# Altium PCB Control_PS_PCB.PcbDoc
Units mm, origin at the board's own origin, x right, y up, seen from the top; angles counter-clockwise.
Board outline 150 x 60 mm, 2 copper layers (Top Layer, Bottom Layer); 69 components, 46 nets, 167 pads, 5 vias.
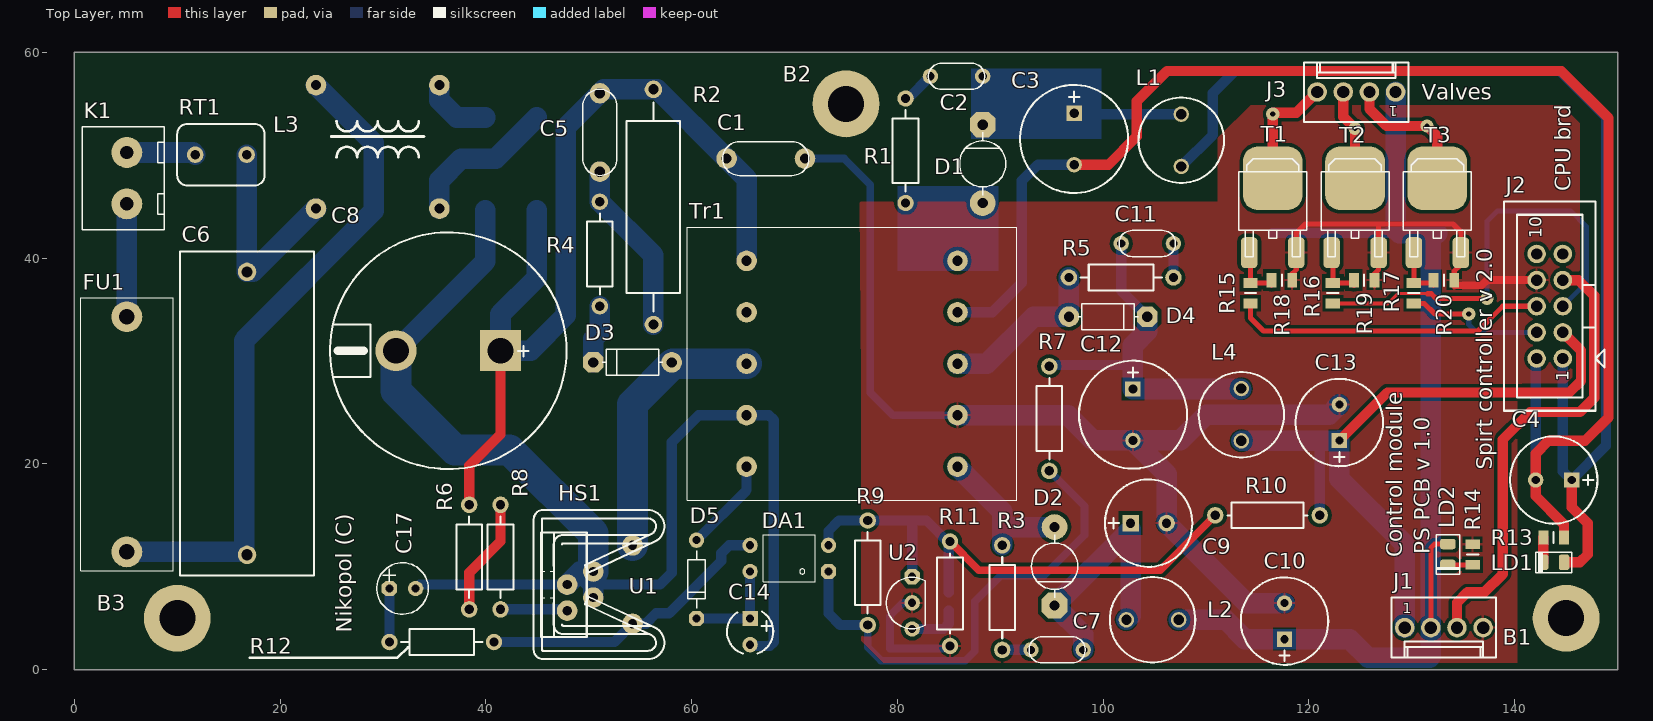
[diagram p0: Top Layer view]
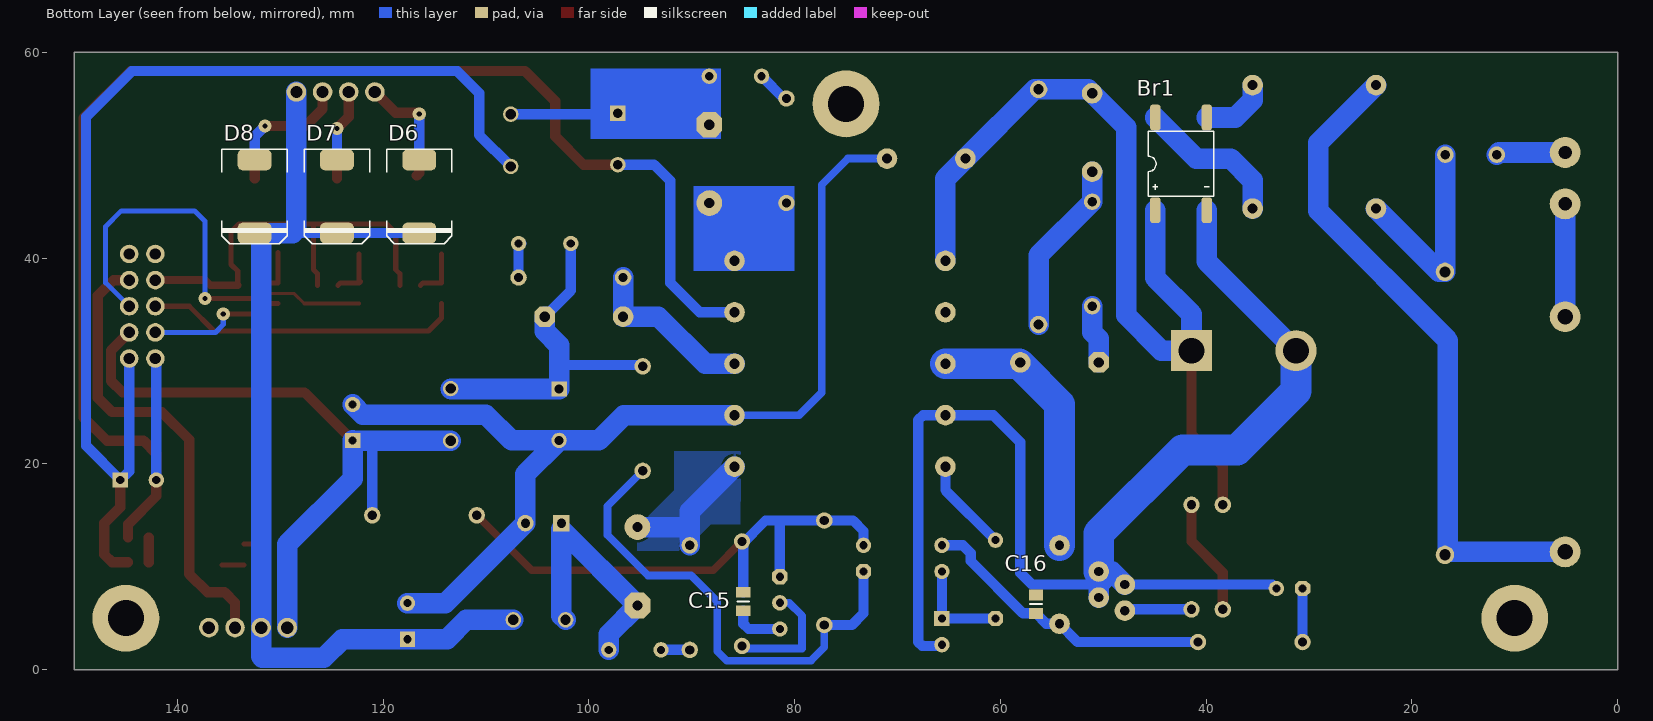
[diagram p1: Bottom Layer view, seen from below]
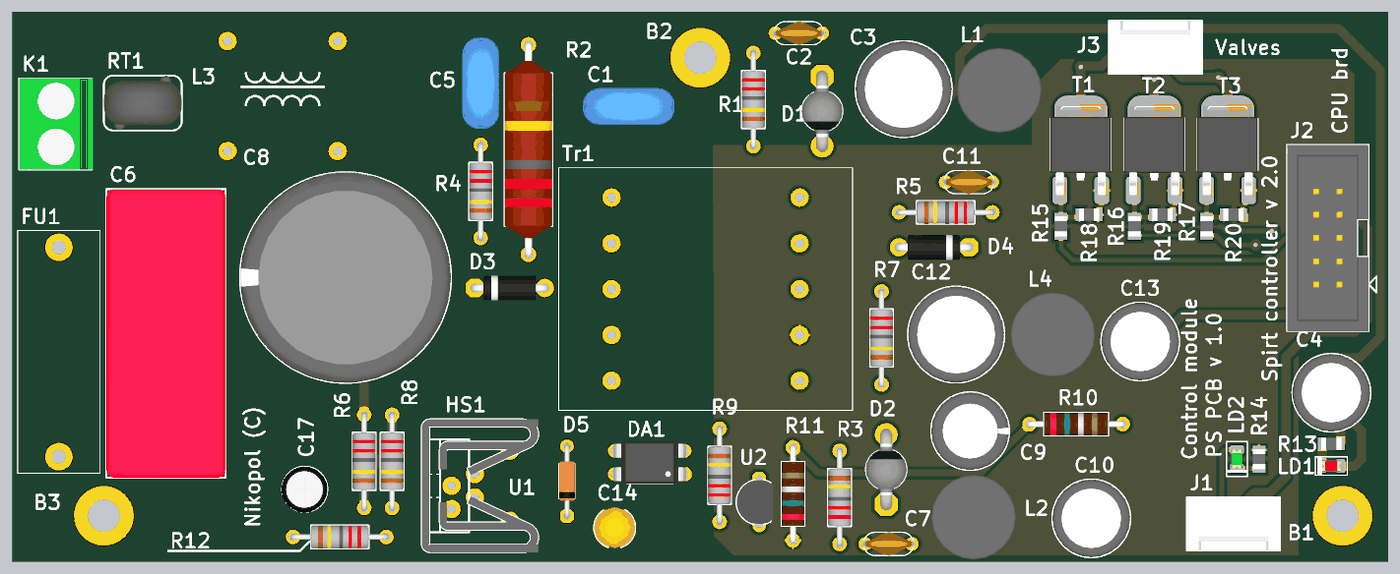
[diagram p2: 3D render of the assembled board from above, using the file's embedded part models]
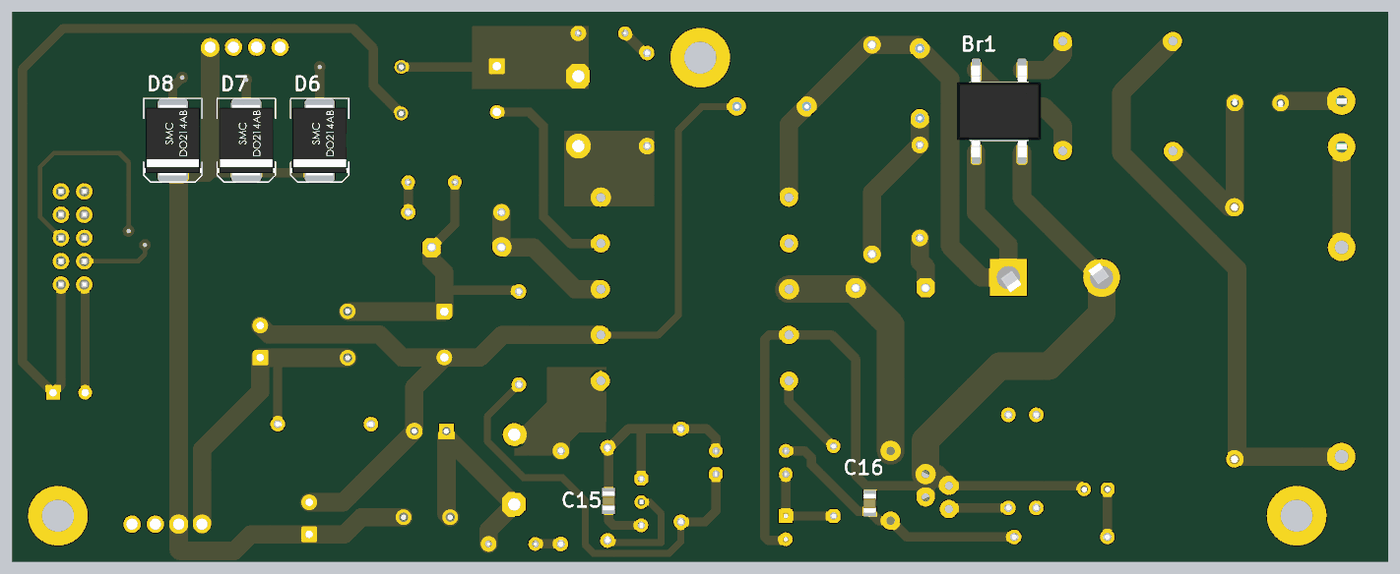
[diagram p3: 3D render of the assembled board from below, using the file's embedded part models]

## Layer stack, top to bottom
Top Solder: solder mask 0.0102, Solder Resist, Dk 3.5
Top Layer: signal copper 0.0356
Dielectric 1: dielectric 0.32, FR-4, Dk 4.8
Bottom Layer: signal copper 0.0356
Bottom Solder: solder mask 0.0102, Solder Resist, Dk 3.5

## Board outline
0,0 150,0 150,60 0,60

## Design rules (kind name [scope] priority, off if disabled: settings)
Clearance Clearance_1 [InNamedPolygon('Bottom Layer- GND')] p1: gap=0.35
Clearance [All] p2: gap=0.254
Height [All] p1: minheight=0 maxheight=50 prefheight=12.7
HoleSize [All] p1: absolutevalues=TRUE maxlimit=10 minlimit=0.025 maxpercent=80.000 minpercent=20.000
PolygonConnect [All] p1: connectstyle=Relief reliefconductorwidth=0.254 reliefentries=4 polygonreliefangle="90 Angle" airgapwidth=0.254
RoutingVias [All] p1: holewidth=0.711 width=1.27 viastyle="Through Hole" minholewidth=0.711 minwidth=1.27 maxholewidth=0.711 maxwidth=1.27
SilkToSilkClearance [All] p1: silktosilkclearance=0
SilkToSolderMaskClearance [IsPad] p1: minsilkscreentomaskgap=0 clearancetoexposedcopper=TRUE
SolderMaskExpansion [All] p1: expansion=0.102
UnpouredPolygon [All] p1: allowunpoured=FALSE
Width [All] p1: maxlimit=5 minlimit=0.254 preferedwidth=0.5
25 further rules are at their usual default settings.

## Components (designator, comment, footprint, x,y, rotation, side; value= is the part's Value field where it differs from the comment)
B1 "Plated Hole" MTG350_650 145,5 r0 top
B2 "Plated Hole" MTG350_650 75,55 r0 top
B3 "Plated Hole" MTG350_650 10,5 r0 top
Br1 "DB104-S" DB-S 42.437,49.168 r180 bottom
C1 "2.2n" "C Y2 7.5b" 67.202,49.676 r0 top
C2 "22p" Cap-Disk-D5.5-R5.08 85.744,57.677 r0 top
C3 "56uF" CAPPR500-1050X1150 97.174,51.581 r270 top
C4 "100uF" CAPPR350-850X800 143.783,18.434 r180 top
C5 "2.7n" "C Y2 7.5b" 51.073,52.216 r90 top
C6 "1uF" CAPR2750-1300X3150X2400 16.783,24.911 r270 top
C7 "22p" Cap-Disk-D5.5-R5.08 95.523,1.924 r0 top
C8 "150uF" CAPPR1000-2300X4200 36.341,31.007 r180 top
C9 "220uF" CAPPR350-850X1300 104.413,14.243 r0 top
C10 "100uF" CAPPR350-850X800 117.621,4.718 r90 top
C11 "470p" Cap-Disk-D5.5-R5.08 104.286,41.421 r180 top
C12 "470uF" CAPPR500-1050X2200 102.889,24.784 r270 top
C13 "100uF" CAPPR350-850X800 122.955,24.022 r90 top
C14 "1uF" CAPPRB254-450X710 65.678,3.702 r270 top
C15 "680nF" CAPC2012X135N 84.982,6.623 r90 bottom
C16 "100nF" CAPC2012X135N 56.534,6.369 r270 bottom
C17 "47u" El-d5-h11-F2.54 31.896,7.893 r180 top
D1 "BYV26B" SOD-64-300 88.284,49.168 r90 top
D2 "BYV26B" SOD-64-300 95.269,10.052 r270 top
D3 "1N4937" DO-41-300 54.248,29.864 r180 top
D4 "SB180" DO-41-300 100.476,34.309 r0 top
D5 "1N914" DO-35-300 60.471,8.782 r270 top
D6 "SS34" "DO-214AB (SMC)" 116.478,45.993 r270 bottom
D7 "SS34" "DO-214AB (SMC)" 124.479,45.993 r270 bottom
D8 "SS34" "DO-214AB (SMC)" 132.48,45.993 r270 bottom
DA1 "LTV817" DIL4-300a 69.488,10.814 r90 top
FU1 "Fuse-PTF15" FUSE-MCH 5.099,22.879 r90 top
HS1 "Heat Sink No Pad" "HSINK_FISCHER_FK 242 SA 220 O_V" 48.406,8.274 r90 top
J1 "KK®" MOLEX_22-27-2041 133.115,4.083 r0 top
J2 "C-Grid®" MOLEX_70246-1004 143.402,35.325 r90 top
J3 "KK®" MOLEX_22-27-2041 124.606,56.153 r180 top
K1 "TS-501 2P" "TS-501 2P-2.5" 5.099,47.771 r90 top
L1 "3.3uH" IND_WURTH_WE-TI 107.588,51.454 r270 top
L2 "3.3uH" IND_WURTH_WE-TI 104.794,4.845 r0 top
L3 "DLF-302U-2A" DLF-302U-2A 29.483,50.819 r0 top
L4 "3.3uH" IND_WURTH_WE-TI 113.43,24.784 r270 top
LD1 "Led" "Led 0805-Red" 143.783,10.433 r180 top
LD2 "Led" "Led 0805-Green" 133.496,11.195 r270 top
R1 "470k" RES1016-630X250 80.791,50.438 r90 top
R2 "33k" RES2286-1670X520 56.28,44.977 r90 top
R3 "470k" RES1016-630X250 90.189,7.004 r270 top
R4 "6R8" RES1016-630X250 51.073,40.405 r90 top
R5 "22" RES1016-630X250 101.746,38.119 r0 top
R6 "1M" RES1016-630X250 38.373,10.941 r90 top
R7 "100" RES1016-630X250 94.761,24.403 r90 top
R8 "1M" RES1016-630X250 41.421,10.941 r90 top
R9 "1k" RES1016-630X250 77.108,9.417 r270 top
R10 "5k1" RES_ARCOL_RCC025 115.97,15.005 r0 top
R11 "5k1" RES_ARCOL_RCC025 85.109,7.385 r90 top
R12 "6R8" RES1016-630X250 35.706,2.686 r0 top
R13 "5k6" RESC2012X60N 143.783,12.846 r180 top
R14 "5k6" RESC2012X60N 135.909,11.195 r270 top
R15 "100" RESC2012X60N 114.319,36.595 r270 top
R16 "100" RESC2012X60N 122.32,36.595 r270 top
R17 "100" RESC2012X60N 130.194,36.595 r270 top
R18 "18k" RESC2012X60N 117.367,37.865 r180 top
R19 "18k" RESC2012X60N 125.368,37.865 r180 top
R20 "18k" RESC2012X60N 133.115,37.865 r180 top
RT1 "20R" THERM_EPCOS_B57153S0 14.243,50.057 r0 top
T1 "IRLR2905" TO252AA 116.478,44.596 r0 top
T2 "IRLR2905" TO252AA 124.479,44.596 r0 top
T3 "IRLR2905" TO252AA 132.48,44.596 r0 top
Tr1 "EF25-5V-24V-24V" SP-EF25 75.584,29.737 r0 top
U1 "TOP245Y" TO220-7C 47.898,8.274 r90 top
U2 "TL431" TO92C 81.426,6.496 r90 top

## Footprints (in the part's own frame and the unit in brackets; to place one, negate y for a bottom-side part, rotate by r counter-clockwise, add the part's x,y. Pads: shape width x height; smd on the part's side, far side on the other; paste and mask are expansions set on the pad)
"C Y2 7.5b" [mm]
  round 2 hole 1: 1(-3.81,0) 2(3.81,0)
  silkscreen extent -4.19,-1.65 4.19,1.65, body extent -4.99,-2 4.99,2, height 12.5
Cap-Disk-D5.5-R5.08 [mm]
  round 1.5 hole 0.8: 1(-2.54,0) 2(2.54,0)
  silkscreen extent -2.73,-1.27 2.73,1.27, body extent -2.73,-1.27 2.73,1.27, height 7.62
CAPC2012X135N [mm] "Chip Capacitor, Body 2.0x1.25mm, IPC Medium Density"
  rect 1.05x1.4 smd: 1(-0.9,0) 2(0.9,0)
  silkscreen extent 0,-0.58 0,0.58, body extent -1.05,-0.67 1.05,0.68, height 1.25
CAPPR350-850X800 [mm] "Capacitor, Radial, Pin spacing 3.5mm - Body Diameter 8.5mm x Body Height 8.0mm"
  rect 1.5x1.5 hole 0.8: 1(-1.75,0)
  round 1.5 hole 0.8: 2(1.75,0)
  silkscreen extent -4.25,-4.25 4.25,4.25, body extent -4.25,-4.25 4.25,4.25, height 8
CAPPR350-850X1300 [mm] "Capacitor, Radial, Pin spacing 3.5mm - Body Diameter 8.5mm x Body Height 13mm"
  rect 1.6x1.6 hole 0.9: 1(-1.75,0)
  round 1.6 hole 0.9: 2(1.75,0)
  silkscreen extent -4.25,-4.25 4.25,4.25, body extent -4.25,-4.25 4.25,4.25, height 13
CAPPR500-1050X1150 [mm] "Capacitor, Radial, Pin spacing 5.0mm - Body Diameter 10.5mm X Body Height 11.5mm"
  rect 1.5x1.5 hole 0.9: 1(-2.5,0)
  round 1.5 hole 0.9: 2(2.5,0)
  silkscreen extent -5.25,-5.25 5.25,5.25, body extent -5.25,-5.23 5.25,5.23, height 11.5
CAPPR500-1050X2200 [mm] "Capacitor, Radial, Pin spacing 5.0mm - Body Diameter 10.5mm X Body Height 22mm"
  rect 1.5x1.5 hole 0.9: 1(-2.5,0)
  round 1.5 hole 0.9: 2(2.5,0)
  silkscreen extent -5.25,-5.25 5.25,5.25, body extent -5.25,-5.23 5.25,5.23, height 22
CAPPR1000-2300X4200 [mm] "Capacitor, Radial, Pins spacing 10mm - Body Diameter 23mm X Body  Height 42mm"
  rect 4x4 hole 2.5: 1(-5.08,0)
  round 4 hole 2.5: 2(5.08,0)
  silkscreen extent -11.5,-11.5 11.5,11.5, body extent -11.5,-11.5 11.5,11.5, height 42
CAPPRB254-450X710 [mm] "Capacitor, Polarized Radial Bead, Pin spacing 2.54mm - Body Diameter 4.5mm X Body Height 7.1mm"
  rect 1.5x1.5 hole 0.8: 1(-1.27,0)
  round 1.5 hole 0.8: 2(1.27,0)
  silkscreen extent -1.93,-2.25 2.13,2.25, body extent -2.25,-2.25 2.25,2.25, height 7.08
CAPR2750-1300X3150X2400 [mm] "Capacitor Radial, Pin spacing 27.5mm - Body With 13mm X Body Length 31.5mm X Body Height 24mm"
  round 1.8 hole 1.1: 1(-13.75,0) 2(13.75,0)
  silkscreen extent -15.75,-6.5 15.75,6.5, body extent -15.75,-6.5 15.75,6.5, height 24
DB-S [mm] "SMD 5mm x 9mm"
  rrect50% 1x2.5 smd: 1(-2.5,-4.5) 2(2.5,-4.5) 3(2.5,4.5) 4(-2.5,4.5)
  silkscreen extent -3.18,-3.18 3.18,3.18, body extent -4.58,-5.03 4.57,5.02, height 3.35
DIL4-300a [mm]
  oct 1.5x1.5 hole 0.8: 1(-1.27,-3.81)
  round 1.5 hole 0.8: 2(1.27,-3.81) 3(1.27,3.81) 4(-1.27,3.81)
  silkscreen extent -2.29,-2.54 2.29,2.54, body extent -2.29,-3.96 2.29,3.96, height 4.25
DLF-302U-2A [mm]
  round 2 hole 1: 1(-6,6) 2(-6,-6) 3(6,6) 4(6,-6)
  silkscreen extent -4.5,-1 4.5,2.5
DO-35-300 [mm]
  round 1.5 hole 0.8: 1(-3.81,0)
  oct 1.5x1.5 hole 0.8: 2(3.81,0)
  silkscreen extent -2.79,-0.86 2.79,0.86, body extent -4.08,-0.86 4.07,0.86, height 2.13
DO-41-300 [mm]
  round 2 hole 1: 1(-3.81,0)
  oct 2x2 hole 1: 2(3.81,0)
  silkscreen extent -2.92,-1.27 2.92,1.27, body extent -4.24,-1.36 4.24,1.36, height 2.81
"DO-214AB (SMC)" [mil] "DO-214-AB/SMC; 2 C-Bend Leads; Body 7.9 x 5.9 mm, inc. leads (LxW)"
  rrect50% 80x130 smd: 1(-140,0) 2(140,0)
  silkscreen extent -180,-125 180,125, body extent -154,-116 154,116, height 95
El-d5-h11-F2.54 [mm]
  oct 1.5x1.5 hole 0.8: 1(1.27,0)
  round 1.5 hole 0.8: 2(-1.27,0)
  silkscreen extent -2.5,-2.5 2.5,2.5, body extent -2.5,-2.5 2.55,2.55, height 11.53
FUSE-MCH [mm]
  round 3 hole 1.5: 1(-11.43,0) 2(11.43,0)
  silkscreen extent -13.25,-4.5 13.25,4.5, body extent -13.25,-4.5 13.25,4.5, height 15.5
"HSINK_FISCHER_FK 242 SA 220 O_V" [mm] "TO-220 Heat Sink  Rth: 26°C/W - Vertical Mount"
  silkscreen extent -7.25,-8.94 7.25,3.76, body extent -7.25,-8.95 7.25,3.76, height 20.62
IND_WURTH_WE-TI [mm] "Radial Leaded Wire Wound Inductor D=8.3mm"
  round 1.5 hole 1: 1(-2.54,0) 2(2.54,0)
  silkscreen extent -4.15,-4.15 4.15,4.15, body extent -4.65,-4.65 4.65,4.65, height 10
"Led 0805-Green" [mil]
  rrect50% 40x60 smd: 1(-40,0) 2(40,0)
  silkscreen extent -75,-45 75,45, body extent -40,-25 40,25, height 43
"Led 0805-Red" [mil]
  rrect50% 40x60 smd: 1(-40,0) 2(40,0)
  silkscreen extent -69,-40 69,40, body extent -40,-25 40,25, height 43
MOLEX_22-27-2041 [mm] "2.54mm (.100\") Pitch KK® Header, Single Row, Vertical, 4 Circuits"
  round 1.9 hole 1.2: 1(-3.81,0) 2(-1.27,0) 3(1.27,0) 4(3.81,0)
  silkscreen extent -5.08,-2.88 5.08,2.92, body extent -5.08,-2.88 5.08,2.92, height 11.7
MOLEX_70246-1004 [mm] "2.54mm Pitch C-Grid® Header, Low Profile, Dual Row, Vertical, Shrouded Header"
  round 1.8 hole 1.1: 1(-5.08,-1.27) 2(-5.08,1.27) 3(-2.54,-1.27) 4(-2.54,1.27) 5(0,-1.27) 6(0,1.27) 7(2.54,-1.27) 8(2.54,1.27) 9(5.08,-1.27) 10(5.08,1.27)
  silkscreen extent -10.16,-5.31 10.16,4.45, body extent -10.16,-4.44 10.16,4.45, height 9.27
MTG350_650 [mm] "Plated Through Hole: Hole Dia.=3.5mm Pad Dia.=6.5mm"
  round 6.5 hole 3.5: 1(0,0)
RES1016-630X250 [mm] "Resistor, Axial, Pad spacing 10.16 mm - Body Lengh 6.3mm X Body Diameter 2.5mm"
  round 1.6 hole 0.9: 1(-5.08,0) 2(5.08,0)
  silkscreen extent -3.95,-1.25 3.95,1.25, body extent -5.38,-1.27 5.38,1.26, height 2.51
RES2286-1670X520 [mm] "Resistor, Axial, Pad spacing 22.22 mm - Body Lengh 16.7mm X Body Diameter 5.2mm"
  round 1.7 hole 1: 1(-11.43,0) 2(11.43,0)
  silkscreen extent -10.16,-2.6 10.16,2.6, body extent -11.82,-2.6 11.82,2.6, height 5.2
RES_ARCOL_RCC025 [mm] "Resistor, Axial, Pad spacing 10.16 mm - Body Lengh 6.3m X Body Diameter 2.4mm"
  round 1.6 hole 0.9: 1(-5.08,0) 2(5.08,0)
  silkscreen extent -3.88,-1.25 3.88,1.25, body extent -5.38,-1.25 5.38,1.25, height 2.5
RESC2012X60N [mm] "Chip Resistor, EIA 0805, Metric 2012, Body 2.0x1.2mm, IPC Medium Density"
  rect 0.95x1.4 smd: 1(-1,0) 2(1,0)
  silkscreen extent 0,-0.55 0,0.55, body extent -1.1,-0.67 1.1,0.68, height 0.6
SOD-64-300 [mm]
  round 2.5 hole 1: 1(-3.81,0)
  oct 2.5x2.5 hole 1: 2(3.81,0)
  silkscreen extent -3.05,-2.25 3.05,2.25, body extent -4.49,-2.25 4.48,2.25, height 4.79
SP-EF25 [mm]
  round 2 hole 1: 1(-10.25,10) 2(-10.25,5) 3(-10.25,0) 4(-10.25,-5) 5(-10.25,-10) 6(10.25,-10) 7(10.25,-5) 8(10.25,0) 9(10.25,5) 10(10.25,10)
  silkscreen extent -16,-13.25 16,13.25, body extent -16,-13.25 16,13.25, height 21.5
THERM_EPCOS_B57153S0 [mm] "NTC thermistors, Body  D 8.5mm x W 6mm x H 13mmxxx"
  round 1.6 hole 0.9: 1(-2.5,0) 2(2.5,0)
  silkscreen extent -4.25,-3 4.25,3, body extent -4.25,-3 4.25,3, height 13
TO92C [mm]
  oct 1.5x1.5 hole 0.8: 1(2.54,0)
  round 1.5 hole 0.8: 2(0,0) 3(-2.54,0)
  silkscreen extent -2.51,-1.27 2.49,2.51, body extent -2.79,-1.52 2.79,2.41, height 8
TO220-7C [mm]
  round 2 hole 0.9: 1(-3.81,-6.35) 2(-2.54,0) 3(-1.27,-2.54) 4(0,0) 5(1.27,-2.54) 7(3.81,-6.35)
  silkscreen extent -5.08,-1.91 5.08,2.54
TO252AA [mm]
  rrect50% 1.6x3 smd: 1(-2.286,-4.064) 3(2.286,-4.064)
  rrect50% 5.8x6.2 smd: 2(0,3.175)
  silkscreen extent -3.3,-4.44 3.3,5.08, body extent -3.3,-4.82 3.28,5.32, height 2.3
"TS-501 2P-2.5" [mm]
  round 3 hole 1.3: 1(-2.5,0) 2(2.5,0)
  silkscreen extent -5,-3.65 5,4.35, body extent -5,-3.75 5,4.35, height 1.5

## Part data
B1 B2 B3: library part PLATED_HOLE3.5_PAD6.5, "Single Terminal Socket"
Br1: "SMD 1A 400V"
C1 C5: library part "Y2 1n 250V AC", "Y2 250V AC Y5P"
C2 C7: library part "Cer Disc HV 220p 1kV", "22p 1kV Y5P"
C3: library part CAER_56UF_25V_20%_500-1050X1150_LESR0R025, "Polarised capacitor"
C4 C10 C13: library part CAER_100UF_25V_20%_RUBYCON_25ML100M8X7, "Polarised capacitor"
C6: library part CPPR_1UF_275VAC_20%_2750-1300X3150X2400, "Non-polarised capacitor"
C8: library part CAER_150UF_400V_20%_EPCOS_B43501A9157M000, "Polarised capacitor"
C9: library part CAER_220UF_25V_20%_RUBYCON_25YXF220M8X11.5, "Polarised capacitor"
C11: library part "Cer Disc HV 220p 1kV", "470p 1kV Y5P"
C12: library part CAER_470UF_25V_20%_500-1050X2200_LESR0R062, "Polarised capacitor"
C14: library part CTEB_1UF_35V_10%_254-450X710, "Polarised capacitor"
C15: library part CC0805_680NF_16V_10%_X7R, "Non-polarised capacitor"
C16: library part CC0805_100NF_50V_10%_X7R, "Non-polarised capacitor"
C17: library part 47u-25V-105, "25V-105"
D1 D2: library part BYV27-100, "100V 2A 25nS"
D3: library part 1N4007, "1000V 1A"
D4: library part 1N4007
D5: library part 1N4148, "DO-35 75V 0.2A 1uS 4A 4nS"
D6 D7 D8: "SMD SMC  40V 3A"
FU1: "5mm 6.3A"
HS1: library part "HSINK_FISCHER_FK 242 SA 220 O_v", "Heat Sink Without Pad"
J1 J3: library part MOLEX_22-27-2041, "Connector 4 Male"
J2: library part MOLEX_70246-1004, "Connector 10 Male"
K1: "10A/300V AC 5mm"
L1 L2 L4: library part IND_3.3UH_20%_WURTH_WE-TI, "Inductor With Magnetic core"
LD1: library part "Led 0805 KP-2012EC", "Red  627nm 12mcd"
LD2: library part "Led 0805 KP-2012SGC", "Green 565nm 15mcd"
R1 R3: library part RMF_470K_1%_0.6W_50PPM_1016-630X250, "Resistor - 1%"
R2: library part RMF_33K_5%_3W_250PPM_2286-1670X520, "Resistor - 5%"
R4 R12: library part RMF_6R8_1%_0.6W_50PPM_1016-630X250, "Resistor - 1%"
R5: library part RMF_22R_1%_0.6W_50PPM_1016-630X250, "Resistor - 1%"
R6 R8: library part RMF_1M_1%_0.6W_50PPM_1016-630X250, "Resistor - 1%"
R7: library part RMF_100R_1%_0.6W_50PPM_1016-630X250, "Resistor - 1%"
R9: library part RMF_1K_1%_0.6W_50PPM_1016-630X250, "Resistor - 1%"
R10 R11: library part RCF_5K1_5%_0.25W_+10-6PPM_ARCOL_RCC025, "Resistor - 5%"
R13 R14: library part R0805_5K6_1%_0.125W_100PPM, "Resistor - 1%"
R15 R16 R17: library part R0805_100R_1%_0.125W_100PPM, "Resistor - 1%"
R18 R19 R20: library part R0805_18K_1%_0.125W_100PPM, "Resistor - 1%"
RT1: library part THERM_NTC_20R_EPCOS_B57153S0200M000, "Thermistor NTC (Negative Temperature Coefficient)"
T1 T2 T3: "55V 27moM 42A"
U1: library part TOP244Y, "45W 1.35A 132kHz"

## Via types
v1: diameter 1.27, hole 0.5, Top Layer to Bottom Layer, tented both sides, 5 vias

## Nets (pads, with @x,y where several pads share a name; then routed paths per layer and width w, separated by ;. In a path a pad name is that pad's centre, name@x,y a point inside that pad or via, vN(x,y) a via of type N, cw(c..) or ccw(c..) an arc to the next point about the centre after c; other vN are vias at no path point)
+5V: C13.1 J1.1 J2.3 L4.2 R10.2 | length 68.8
  Top Layer w1: C13.1 127.626,26.943 145.307,26.943 146.45,28.086 146.45,31.007 J2.3
  Bottom Layer w1: R10.2 121.05,22.117
  Bottom Layer w2: L4.2 C13.1@122.927,22.244 ; C13.1 122.955,18.561 129.305,12.211 J1.1
+24V: C10.1 D6.2 D7.2 D8.2 J1.2 J3.1 L2.2 LD2.1 | length 106
  Top Layer w0.5: J1.2 131.845,11.83 132.226,12.211 LD2.1
  Bottom Layer w1: D6.2 D7.2 128.797,42.437 128.416,42.818
  Bottom Layer w2: L2.2 111.906,4.845 113.783,2.968 C10.1 123.943,2.968 125.749,1.162 131.718,1.162 131.845,1.289 J1.2 D8.2@131.845,41.802 ; 128.416,42.818 J3.1 ; 128.797,42.437 D8.2
+24V2: C4.1 J2.1 L1.2 LD1.1 | length 108.7
  Top Layer w1: LD1.1 146.323,10.433 147.085,11.195 147.085,14.243 145.533,15.795 C4.1
  Bottom Layer w1: L1.2 110.636,51.962 110.636,56.026 112.795,58.185 144.418,58.185 148.863,53.74 148.863,21.764 C4.1 144.672,19.295 J2.1
GND: C1.2 C9.2 C10.2 C12.2 C13.2 J1.4 J2.8 R11.1 R14.1 R18.1 R19.1 R20.1 T1.3 T2.3 T3.3 Tr1.7 U2.2 | length 154
  Top Layer w0.5: R18.1@118.367,37.357 118.367,38.484 118.764,38.881 T1.3 118.764,42.437 119.653,43.326 126.765,43.326 T2.3 126.765,38.881 126.368,38.484 R19.1@126.368,37.357 ; 126.892,43.326 134.004,43.326 134.766,42.564 T3.3 134.766,39.389 134.115,38.738 R20.1@134.115,37.357
  Top Layer w0.75: R20.1@134.115,37.357 136.798,37.357 137.306,37.865 J2.8
  Bottom Layer w0.75: C1.2 74.822,49.676 77.362,47.136 77.362,26.943 79.568,24.737 Tr1.7 ; U2.2 80.537,6.496 79.267,5.226 79.267,2.051 R11.1@85.109,2.051
  Bottom Layer w2: Tr1.7 96.586,24.737 99.039,22.284 C12.2 ; C10.2 113.938,6.468 C9.2 106.163,19.01 C12.2 ; C13.2 121.967,24.784 110.001,24.784 107.501,22.284 C12.2
GND2: C3.2 C4.2 J2.2 R13.1 Tr1.9 | length 141.3
  Top Layer w1: C3.2 100.516,49.081 103.27,51.835 103.27,55.264 106.191,58.185 144.545,58.185 149.117,53.613 149.117,24.53 146.831,22.244 143.275,22.244 142.033,21.002 C4.2 142.033,16.882 144.783,14.132 R13.1
  Bottom Layer w1: Tr1.9 89.22,34.737 92.094,37.611 92.094,47.517 93.658,49.081 C3.2 ; C4.2 J2.2@142.033,30.146
NetBr1_1: Br1.1 C1.1 C5.2 C8.1 R2.2 R6.2 Tr1.1 | length 88.1
  Top Layer w1: R6.2 38.373,19.831 41.421,22.879 C8.1
  Bottom Layer w2: Br1.1 44.937,38.079 41.421,34.563 C8.1 44.342,31.007 47.771,34.436 47.771,52.724 C5.2 51.454,56.407 R2.2 56.661,56.407 C1.1 65.334,47.734 Tr1.1
NetBr1_2: Br1.2 C8.2 C14.2 C16.1 C17.2 Tr1.4 U1.3 U1.4 U1.5 | length 127
  Bottom Layer w0.5: C8.2@30.626,30.372 C8.2 ; 30.88,26.689 31.261,27.07
  Bottom Layer w1: C17.2 33.547,8.274 U1.4 ; 50.438,8.274 56.915,8.274 58.058,9.417 58.058,22.117 60.678,24.737 Tr1.4 67.503,24.737 67.964,24.276 67.964,2.686 67.583,2.305 C14.2@65.678,2.305
  Bottom Layer w2: C8.2 39.937,39.683 Br1.2 ; U1.4 49.168,9.544 50.438,8.274 U1.3
  Bottom Layer w3: C8.2 31.261,27.07 36.976,21.355 42.31,21.355 50.438,13.227 U1.5
NetBr1_3: Br1.3 L3.3 | length 6.6
  Bottom Layer w2: L3.3 35.483,55.36 37.175,53.668 Br1.3
NetBr1_4: Br1.4 L3.4 | length 14.7
  Bottom Layer w2: L3.4 35.483,47.548 37.611,49.676 40.945,49.676 Br1.4
NetC2_1: C2.1 R1.2 | length 3.3
  Bottom Layer w1: R1.2 81.045,55.518 C2.1
NetC2_2: C2.2 C3.1 D1.2 L1.1 | length 24.5
  Bottom Layer w1: C2.2 D1.2 96.071,52.978 C3.1 97.261,53.994 L1.1
NetC5_1: C5.1 R2.1 R4.2 | length 17
  Bottom Layer w2: C5.1 R4.2 56.28,40.278 R2.1
NetC6_1: C6.1 L3.2 RT1.2 | length 20.6
  Bottom Layer w2: RT1.2 16.743,38.701 17.365,38.701 L3.2
NetC6_2: C6.2 FU1.1 L3.1 | length 64.3
  Bottom Layer w2: FU1.1 16.495,11.449 16.495,31.989 29.102,44.596 29.102,51.2 L3.1
NetC7_1: C7.1 R3.2 | length 2.8
  Bottom Layer w1: R3.2 C7.1
NetC7_2: C7.2 C9.1 D2.2 L2.1 | length 24.9
  Bottom Layer w2: C7.2 98.063,3.448 D2.2 102.663,13.636 102.663,5.254 L2.1
NetC11_1: C11.1 R5.2 | length 3.4
  Bottom Layer w1: C11.1@106.572,41.421 106.826,41.167 R5.2
NetC11_2: C11.2 C12.1 D4.2 L4.1 R7.2 | length 34.4
  Bottom Layer w1: R7.2 94.888,29.61 102.889,29.61 ; C11.2 101.746,36.849 D4.2
  Bottom Layer w2: D4.2 104.286,32.912 102.889,31.515 102.889,29.61 C12.1 L4.1@113.39,27.284
NetC14_1: C14.1 D5.2 DA1.4 | length 9.8
  Bottom Layer w1: D5.2 C14.1 DA1.4
NetC15_1: C15.1 U2.3 | length 5
  Bottom Layer w1: U2.3 84.474,3.956 84.982,4.464 C15.1
NetC15_2: C15.2 DA1.2 R9.1 R10.1 R11.2 U2.1 | length 53.6
  Top Layer w0.75: R11.2 87.903,9.671 105.556,9.671 R10.1
  Bottom Layer w1: DA1.2 73.298,13.481 74.314,14.497 R9.1 82.823,14.497 R11.2@85.109,12.211 ; U2.1 81.426,14.37 ; C15.2 R11.2@84.982,12.084
NetC16_2: C16.2 DA1.3 R12.2 U1.1 | length 29.2
  Bottom Layer w1: R12.2 52.47,2.686 U1.1 55.529,4.464 C16.2 56.545,5.48 57.804,5.48 62.884,10.56 62.884,11.322 63.646,12.084 DA1.3
NetC17_1: C17.1 R12.1 | length 5.3
  Bottom Layer w1: R12.1 C17.1@30.626,8.02
NetD1_1: D1.1 R1.1 Tr1.10 | length 14.1
  Bottom Layer w1: R1.1 D1.1 88.284,42.187 Tr1.10
NetD2_1: D2.1 R3.1 Tr1.6 | length 14.5
  Bottom Layer w2: Tr1.6 90.189,15.382 90.189,13.862 ; R3.1 90.189,13.862 ; D2.1 90.189,13.862
NetD3_1: D3.1 Tr1.3 U1.7 | length 26.4
  Bottom Layer w3: U1.7 54.248,25.8 58.185,29.737 Tr1.3
NetD3_2: D3.2 R4.1 | length 5.7
  Bottom Layer w2: D3.2 50.438,32.15 51.073,32.785 R4.1
NetD4_1: D4.1 R5.1 Tr1.8 | length 16.5
  Bottom Layer w2: Tr1.8 88.665,29.737 93.237,34.309 D4.1 R5.1
NetD5_1: D5.1 Tr1.5 | length 9.2
  Bottom Layer w1: D5.1 65.334,17.455 Tr1.5
NetD6_1: D6.1 J3.4 T1.2 | length 15.8
  Top Layer w1: T1.2@116.732,48.025 116.478,48.279 116.478,54.121 118.764,54.121 J3.4
  Bottom Layer w1: D6.1 v1(116.478,53.994)
NetD7_1: D7.1 J3.3 T2.2 | length 11.9
  Top Layer w1: J3.3 123.336,53.74 v1(124.479,52.597) T2.2
  Bottom Layer w1: D7.1 v1(124.479,52.597)
NetD8_1: D8.1 J3.2 T3.2 | length 17.1
  Top Layer w1: J3.2 125.876,54.502 127.527,52.851 v1(131.464,52.851) 132.48,51.835 T3.2
  Bottom Layer w1: v1(131.464,52.851) 132.48,51.835 D8.1
NetDA1_1: DA1.1 R7.1 R9.2 | length 47.7
  Bottom Layer w0.75: R9.2 77.108,2.178 78.41,0.876 86.601,0.876 87.522,1.797 87.522,6.623 90.062,9.163 94.253,9.163 98.19,13.1 98.19,15.894 R7.1
  Bottom Layer w1: DA1.1 73.298,5.48 74.441,4.337 R9.2
NetFU1_2: FU1.2 K1.1 | length 11
  Bottom Layer w2: FU1.2 K1.1
NetJ1_3: J1.3 J2.7 | length 45.3
  Top Layer w1: J1.3 134.385,6.496 135.401,7.512 137.052,7.512 138.83,9.29 138.83,22.371 141.497,25.038 146.323,25.038 147.72,26.435 147.72,36.341 146.196,37.865 J2.7
NetJ2_4: J2.4 R17.2 | length 13.7
  Top Layer w0.5: R17.2 131.21,35.595 132.242,34.563 v1(135.528,34.563)
  Bottom Layer w0.5: v1(135.528,34.563) 135.528,33.547 136.29,32.785 J2.4
NetJ2_5: J2.5 R16.2 | length 42.5
  Top Layer w0.3: 127.67,35.595 128.62,36.545 131.533,36.545
  Top Layer w0.35: R16.2 127.67,35.595
  Top Layer w0.5: 131.533,36.545 131.895,36.545 132.353,36.087 v1(137.306,36.087)
  Bottom Layer w0.5: v1(137.306,36.087) 137.306,43.58 138.322,44.596 145.434,44.596 146.958,43.072 146.958,37.611 J2.5
NetJ2_6: J2.6 R15.2 | length 30.8
  Top Layer w0.5: R15.2 114.319,34.182 115.589,32.912 136.417,32.912 138.83,35.325 J2.6
NetK1_2: K1.2 RT1.1 | length 6.7
  Bottom Layer w2: K1.2 11.529,50.271 RT1.1
NetLD1_2: LD1.2 R13.2 | length 2.4
  Top Layer w1: LD1.2 142.783,10.449 R13.2
NetLD2_2: LD2.2 R14.2 | length 2.1
  Top Layer w0.5: LD2.2 R14.2@135.639,10.179
NetR6_1: R6.1 R8.2 | length 11.4
  Top Layer w1: R6.1 38.373,9.417 41.421,12.465 R8.2
NetR8_1: R8.1 U1.2 | length 6.3
  Bottom Layer w1: R8.1 U1.2@47.771,5.861
NetR15_1: R15.1 R18.2 T1.1 | length 5
  Top Layer w0.5: T1.1@114.319,40.405 R15.1 116.129,37.595 R18.2@116.367,37.357
NetR16_1: R16.1 R19.2 T2.1 | length 5.1
  Top Layer w0.5: R16.1@122.193,37.722 R16.1 ; T2.1@122.32,40.405 R16.1 ; R19.2@124.368,37.357 124.13,37.595 R16.1
NetR17_1: R17.1 R20.2 T3.1 | length 5
  Top Layer w0.5: T3.1 R17.1 131.877,37.595 R20.2@132.115,37.357
pads on no net: B1.1 B2.1 B3.1 J2.9 J2.10 Tr1.2

## Polygon pours and split planes (outlines as drawn)
NetD2_1 on Bottom Layer "Bottom Layer- D" (solid, remove dead copper, pour order 2): 85.208,21.228 91.713,21.228 91.713,17.418 95.269,13.862 95.269,11.576 90.697,11.576 90.189,12.084 88.157,14.116 85.255,14.116
GND on Top Layer "Bottom Layer- GND" (solid, remove dead copper, pour order 4): 76.473,28.34 76.473,2.813 78.505,0.781 78.632,0.654 140.227,0.654 140.227,27.324 140.608,27.705 140.735,27.832 146.323,27.832 146.323,53.105 145.053,54.375 144.545,54.883 114.573,54.883 114.319,54.883 111.398,51.962 111.144,51.708 111.144,45.485 76.346,45.485

## Other copper
Bottom Layer:
  rectangle net NetD1_1: 80.029,38.754 89.808,47.009
  rectangle net NetC2_2: 87.141,51.581 99.841,58.439

## Silkscreen, mask and mechanical layers (free items; w line width, h text height)
Top Overlay:
  lines w0.254: 17.037,1.162 31.388,1.162 32.404,2.178
  text "Valves" at 130.956,55.391 h1.52
  text "CPU brd" at 145.434,46.501 h1.52 r90
  text "Spirt controller v 2.0" at 137.814,19.45 h1.52 r90
  text "PS PCB v 1.0" at 131.718,11.195 h1.52 r90
  text "Control module" at 129.051,10.941 h1.52 r90
  text "Nikopol (C)" at 26.943,3.575 h1.52 r90
Mechanical 1:
  the board outline again, w0.254

## Text inside footprints (layer, text, board x,y; h text height)
J1: Top Overlay "1" at 129.095,5.478 h1; Mechanical 14 "1" at 129.095,5.478 h1
J2: Top Overlay "10" at 142.637,41.92 h1.2 r90; Top Overlay "1" at 145.237,28.045 h1.2 r90; Mechanical 14 "10" at 142.637,41.92 h1.2 r90; Mechanical 14 "1" at 145.237,28.045 h1.2 r90
J3: Top Overlay "1" at 128.626,54.758 h1 r180; Mechanical 14 "1" at 128.626,54.758 h1 r180